# Altium PCB PCB1.PcbDoc (part 2 of 2)
Units mm, origin at the board's own origin, x right, y up, seen from the top; angles counter-clockwise.
Board outline 100 x 100 mm, 2 copper layers (Top Layer, Bottom Layer), stack 1.569 mm thick; 195 components, 137 nets, 444 pads, 96 vias.
Unrouted connection lines stored in the file: 120.
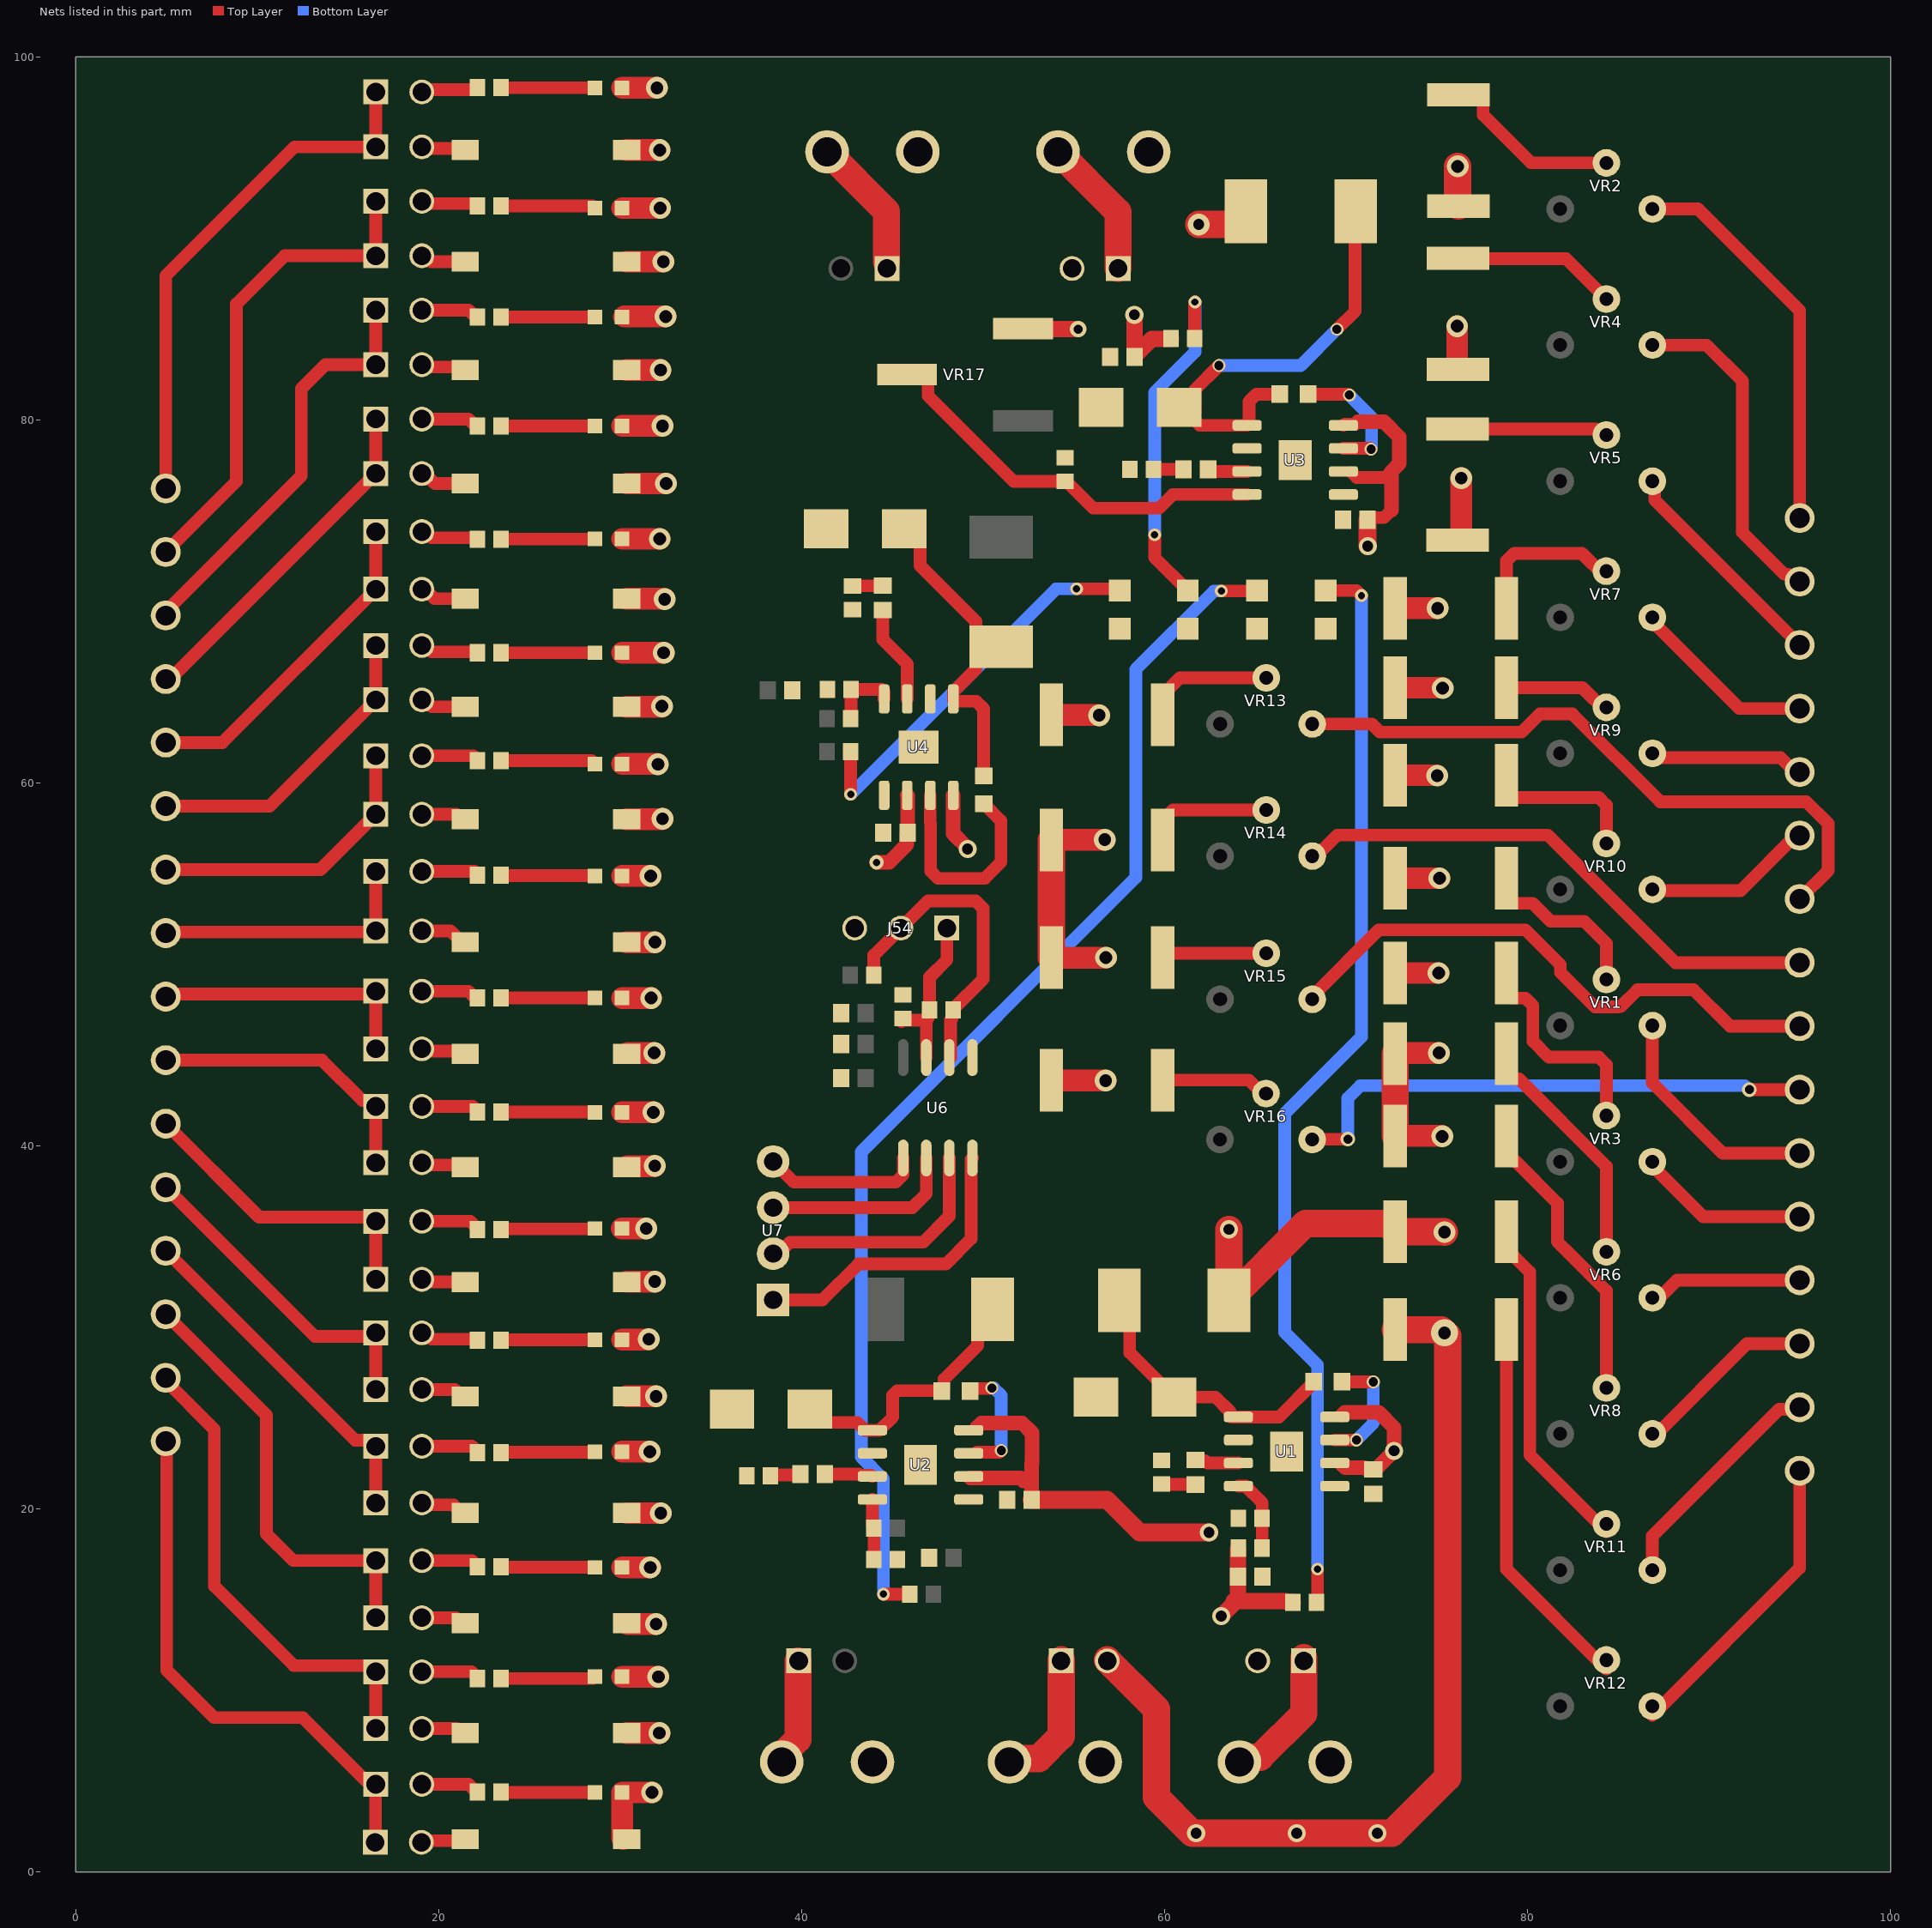
[diagram p2: the nets of this part, all layers, seen from the top]

## Via types
v1: diameter 1.2, hole 0.7, Top Layer to Bottom Layer, 51 vias
v2: diameter 1, hole 0.6, Top Layer to Bottom Layer, 13 vias
v3: diameter 0.7, hole 0.4, Top Layer to Bottom Layer, 8 vias
v4: diameter 0.711, hole 0.5, Top Layer to Bottom Layer, 6 vias
v5: diameter 1.2, hole 0.6, Top Layer to Bottom Layer, 5 vias
v6: diameter 4, hole 3.1, Top Layer to Bottom Layer, 4 vias
v7: diameter 0.7, hole 0.5, Top Layer to Bottom Layer, 3 vias
v8: diameter 0.8, hole 0.5, Top Layer to Bottom Layer, 2 vias
v9: diameter 0.9, hole 0.5, Top Layer to Bottom Layer, 2 vias
v10: diameter 1.5, hole 0.7, Top Layer to Bottom Layer, 1 vias
v11: diameter 0.8, hole 0.4, Top Layer to Bottom Layer, 1 vias

## Nets (pads, with @x,y where several pads share a name; then routed paths per layer and width w, separated by ;. In a path a pad name is that pad's centre, name@x,y a point inside that pad or via, vN(x,y) a via of type N, cw(c..) or ccw(c..) an arc to the next point about the centre after c; other vN are vias at no path point) (continued)
+12V: C3.2 D1.1 D2.1 D3.1 D4.1 D5.1 D6.1 D7.1 D8.1 D9.1 D10.1 D11.1 D12.1 D13.1 D14.1 D15.1 D16.1 J57.02 L1.1 R17.1 R18.1 R19.1 R20.1 R21.1 R22.1 R23.1 R24.1 R25.1 R26.1 R27.1 R28.1 R29.1 R30.1 R31.1 R32.1 R50.1 R52.2 S1.2 S2.2 S3.2 S4.2 S5.2 S6.2 S7.2 S8.2 S9.2 S10.2 S11.2 S12.2 S13.2 S14.2 S15.2 S16.2 | length 186.6
  Top Layer w0.9: v2(63.125,14.094) 63.874,14.843 63.809,14.909 ; R50.1@64.05,17.811 64.05,15.15 63.809,14.909 ; R52.2@67.06,14.843 67.035,14.868 66.736,14.868 66.696,14.909 63.809,14.909 ; R20.1@76.125,82.775 R20.1@76.15,82.75
  Top Layer w1: D6.1@30.1,85.675 30.2,85.675 D6.1@30.225,85.7 ; S11.2@30.35,13.7 S11.2@30.4,13.65 ; S9.2@30.35,19.775 S9.2@30.363,19.762 ; S5.2@30.35,32.5 S5.2@30.375,32.525 ; S3.2@30.35,38.825 S3.2@30.4,38.875 ; S1.2@30.35,45.075 S1.2@30.4,45.125 ; v1@31.55,29.325 v1(31.575,29.35) ; v1@31.875,38.875 v1(31.9,38.9) ; v1@32.05,61.05 v1(32.075,61.025) ; v1@32.275,64.2 v1(32.3,64.225) ; v1@32.425,70.15 v1(32.45,70.125) ; R22.1@72.709,45.075 R22.1@72.759,45.125 ; v1@75,60.425 v1(75.025,60.4) ; v1@75.275,40.55 v1(75.3,40.525) ; v1@75.3,65.25 v1(75.325,65.225)
  Top Layer w1.2: D5.1@30.075,35.45 v1(31.434,35.45) ; D13.1@30.1,10.75 v1(32.1,10.75) ; D11.1@30.1,16.775 v1(31.65,16.775) ; D9.1@30.1,23.15 v1(31.625,23.15) ; D7.1@30.1,29.325 v1@31.55,29.325 ; D3.1@30.1,41.85 v1(31.825,41.85) ; D1.1@30.1,48.15 v1(31.7,48.15) ; D16.1@30.1,54.875 v1(31.675,54.875) ; D14.1@30.1,61.05 v1@32.05,61.05 ; D12.1@30.1,67.175 v1(32.392,67.175) ; D10.1@30.1,73.45 v1(32.175,73.45) ; D8.1@30.1,79.675 v1(32.325,79.675) ; D4.1@30.1,91.675 v1(32.2,91.675) ; D2.1@30.1,98.3 v1(32.025,98.3) ; S15.2@30.15,1.8 30.1,1.85 D15.1@30.1,4.375 v1(31.75,4.375) ; D6.1@30.225,85.7 v1(32.5,85.7) ; S13.2@30.35,7.65 v1(32.157,7.65) ; S7.2@30.35,26.2 v1(31.975,26.2) ; S16.2@30.35,51.225 v1(31.912,51.225) ; S14.2@30.35,58 32.3,58 v1(32.325,58.025) ; S12.2@30.35,64.2 v1@32.275,64.2 ; S10.2@30.35,70.15 v1@32.425,70.15 ; S8.2@30.35,76.5 v1(32.525,76.5) ; S6.2@30.35,82.75 v1(32.225,82.75) ; S4.2@30.35,88.725 v1(32.375,88.725) ; S2.2@30.35,94.875 v1(32.175,94.875) ; S9.2@30.363,19.762 v1(32.238,19.762) ; S5.2@30.375,32.525 v1(31.9,32.525) ; S11.2@30.4,13.65 v1(31.975,13.65) ; S3.2@30.4,38.875 v1@31.875,38.875 ; S1.2@30.4,45.125 v1(31.875,45.125) ; R32.1@53.759,43.625 53.784,43.6 v1(56.75,43.6) ; R31.1@53.759,50.375 56.762,50.375 v1(56.766,50.379) ; R30.1@53.759,56.85 53.784,56.875 v1(56.7,56.875) ; R29.1@53.759,63.75 56.374,63.75 v1(56.393,63.731) ; R24.1@72.709,40.55 v1@75.275,40.55 ; R19.1@72.709,49.525 v1(75.1,49.525) ; R17.1@72.709,54.75 v1(75.15,54.75) ; R26.1@72.709,60.425 v1@75,60.425 ; R25.1@72.709,65.25 v1@75.3,65.25 ; R23.1@72.709,69.625 v1(75.05,69.625) ; R22.1@72.759,45.125 v1(75.125,45.125) ; R20.1@76.125,82.775 v1(76.125,85.173) ; R21.1@76.15,73.375 76.309,73.375 76.35,73.416 v1(76.35,76.8)
  Top Layer w1.5: R31.1@53.759,50.375 R30.1@53.759,56.85 ; J57.02@56.84,11.675 59.55,8.965 59.55,4.1 61.525,2.125 72.526,2.125 75.6,5.199 75.6,29.525 75.25,29.875 R28.1@72.709,29.875 ; v2(63.55,35.4) L1.1@63.55,31.5 67.775,35.725 72.259,35.725 R27.1@72.709,35.275 75.4,35.275 v1(75.425,35.25) ; R24.1@72.709,40.55 R22.1@72.709,45.075 ; v1(76.15,93.975) 76.15,91.834 R18.1@76.2,91.784
  other v2: 61.737,2.125 67.277,2.125 71.729,2.125
  other v10: 75.425,29.7
+24V: J49.2 J55.01 | length 7.7
  Top Layer w1.5: J49.2@64.125,6.05 64.393,6.318 65.268,6.318 67.665,8.715 J55.01@67.665,11.8
+V: C10.2 J56.02 L3.1 R59.2 VR17.3 | length 10.7
  Top Layer w0.7: VR17.3@52.2,85.04 VR17.3@52.232,85.008 ; v9@55.234,85.008 v9(55.237,85.005)
  Top Layer w0.9: VR17.3@52.232,85.008 v9@55.234,85.008 ; v2(58.337,85.797) 58.35,85.783 C10.2@58.35,83.525 ; C10.2@58.35,83.475 C10.2@58.35,83.525 ; R59.2@60.35,84.5 60.325,84.475 59.3,84.475 C10.2@58.35,83.525 ; L3.1@63.75,90.775 L3.1@64.475,91.5
  Top Layer w1.5: v5(61.875,90.775) L3.1@63.75,90.775
GND: C1.2 C2.2 C3.1 C6.1 C8.2 C10.1 C11.2 C14.1 C17.1 C18.1 C19.1 D17.2 D18.1 D19.2 D20.1 D21.2 D22.1 D23.1 D24.2 J49.1 J50.1 J51.1 J52.1 J53.1 J54.03 R49.2 R51.2 R54.1 R56.2 R57.1 R58.2 R61.1 R63.1 R66.1 U1.2 U1.5 U1.9 U2.2 U2.5 U2.9 U3.2 U3.5 U3.9 U4.2 U4.5 U4.9 U6.5
NetC4_1: C4.1 R54.2 | length 1.9
  Top Layer w0.7: R54.2@59.825,21.361 59.837,21.349 61.687,21.349 C4.1@61.7,21.336
NetC4_2: C4.2 U1.3 | length 2.4
  Top Layer w0.7: C4.2@61.7,22.686 61.737,22.649 62.226,22.649 62.349,22.526 U1.3@64.07,22.526
NetC5_1: C5.1 D18.2 L1.2 U1.1 | length 15.7
  Top Layer w0.7: L1.2@57.5,31.5 58.075,30.925 58.075,28.611 D18.2@60.525,26.161 62.8,26.161 63.615,25.346 63.615,25.126 63.675,25.066 U1.1@64.07,25.066 ; U1.1@64.067,25.068 U1.1@64.07,25.066 ; C5.1@68.225,27 68.225,26.975 66.316,25.066 U1.1@64.07,25.066
NetC5_2: C5.2 U1.7 | length 6.5
  Top Layer w0.7: U1.7@69.38,23.796 v4(70.573,23.796) ; C5.2@69.775,26.975 C5.2@69.775,27 v4(71.5,27)
  Bottom Layer w0.7: v4(70.573,23.796) 70.573,23.799 71.5,24.726 v4(71.5,27)
NetC7_1: C7.1 R57.2 | length 1.7
  Top Layer w0.7: R57.2@38.28,21.815 38.33,21.865 39.88,21.865 C7.1@39.93,21.915
NetC7_2: C7.2 U2.3 | length 2.7
  Top Layer w0.7: C7.2@41.28,21.915 43.17,21.915 43.235,21.85 43.835,21.85 U2.3@43.895,21.79
NetC9_1: C9.1 D20.2 L2.2 U2.1 | length 14.8
  Top Layer w0.7: D20.2@40.455,25.49 41.18,24.765 43.065,24.765 43.5,24.33 U2.1@43.895,24.33 44.29,24.33 45.015,25.055 45.015,26.265 45.265,26.515 C9.1@47.475,26.515 ; C9.1@47.725,26.525 C9.1@47.725,26.5 47.835,26.61 47.835,27.135 49.7,29 49.7,30.175 L2.2@50.525,31
NetC9_2: C9.2 U2.7 | length 6.4
  Top Layer w0.7: C9.2@49.275,26.5 49.275,26.525 49.385,26.635 50.445,26.635 50.473,26.663 v4(50.476,26.663) ; U2.7@49.66,23.12 50.9,23.12 50.997,23.218 v4(51,23.218)
  Bottom Layer w0.7: v4(50.476,26.663) 50.478,26.661 50.587,26.661 51,26.248 v4(51,23.218)
NetC12_1: C12.1 R61.2 | length 1.7
  Top Layer w0.7: R61.2@59.375,77.275 C12.1@61.05,77.275
NetC12_2: C12.2 U3.3 | length 2.2
  Top Layer w0.7: C12.2@62.4,77.275 62.4,77.265 62.5,77.165 U3.3@64.545,77.165
NetC13_1: C13.1 D22.2 L3.2 U3.1 | length 25
  Top Layer w0.7: D22.2@60.8,80.7 61.075,80.425 D22.2@61.675,80.425 ; D22.2@60.95,80.7 61.945,79.705 U3.1@64.545,79.705 ; D22.2@61.475,80.5 61.675,80.7 61.675,81.675 v7(63,83) ; U3.1@64.65,79.765 64.65,81.015 65.06,81.425 C13.1@66.35,81.425 ; v7(69.5,85) 70.5,86 L3.2@70.5,90.966
  Bottom Layer w0.7: v7(63,83) 67.5,83 v7(69.5,85)
NetC13_2: C13.2 U3.7 | length 7.3
  Top Layer w0.7: C13.2@67.9,81.425 70.126,81.425 70.178,81.373 v4(70.181,81.373) ; U3.7@69.855,78.435 69.864,78.444 71.325,78.444 v7(71.375,78.394)
  Bottom Layer w0.7: v4(70.181,81.373) 71.41,80.144 71.41,78.485 71.375,78.45 v7(71.375,78.394)
NetC15_1: C15.1 R63.2 | length 1.7
  Top Layer w0.7: R63.2@42.8,70.85 42.813,70.862 44.462,70.862 C15.1@44.475,70.875
NetC15_2: C15.2 U4.3 | length 5.5
  Top Layer w0.7: C15.2@44.475,69.525 44.475,67.895 45.815,66.555 U4.3@45.815,64.63
NetC16_1: C16.1 D23.2 L4.2 U4.1 | length 18.5
  Top Layer w0.7: D23.2@45.65,74 45.8,74 46.525,73.275 46.525,71.975 49.6,68.9 49.6,68.325 L4.2@50.425,67.5 ; C16.1@50.025,60.4 50.025,64.09 49.615,64.5 48.415,64.5 48.355,64.56 U4.1@48.355,64.63 48.355,65.025 49.6,66.27 49.6,66.675 L4.2@50.425,67.5 ; L4.2@51,67.5 L4.2@50.425,67.5
NetC16_2: C16.2 U4.7 | length 12.2
  Top Layer w0.7: U4.7@47.085,59.32 47.083,59.317 47.083,57.785 47.1,57.768 47.1,55.154 47.51,54.744 50.09,54.744 50.986,55.64 50.986,57.914 50.05,58.85 C16.2@50.025,58.85
NetD1_2: D1.2 R1.2 | length 5.2
  Top Layer w0.7: R1.2@23.425,48.15 D1.2@28.6,48.15
NetD2_2: D2.2 R2.2 | length 5.2
  Top Layer w0.7: R2.2@23.425,98.325 23.437,98.312 28.587,98.312 D2.2@28.6,98.3
NetD3_2: D3.2 R3.2 | length 5.2
  Top Layer w0.7: R3.2@23.425,41.875 23.437,41.863 28.587,41.863 D3.2@28.6,41.85
NetD4_2: D4.2 R4.2 | length 5.2
  Top Layer w0.7: R4.2@23.425,91.8 28.475,91.8 D4.2@28.6,91.675
NetD5_2: D5.2 R5.2 | length 5.2
  Top Layer w0.7: R5.2@23.425,35.4 23.45,35.425 28.55,35.425 D5.2@28.575,35.45
NetD6_2: D6.2 R6.2 | length 5.2
  Top Layer w0.7: R6.2@23.425,85.675 D6.2@28.6,85.675
NetD7_2: D7.2 R7.2 | length 5.2
  Top Layer w0.7: R7.2@23.425,29.3 23.437,29.313 28.587,29.313 D7.2@28.6,29.325
NetD8_2: D8.2 R8.2 | length 5.2
  Top Layer w0.7: R8.2@23.425,79.675 D8.2@28.6,79.675
NetD9_2: D9.2 R9.2 | length 5.2
  Top Layer w0.7: R9.2@23.425,23.1 23.45,23.125 28.575,23.125 D9.2@28.6,23.15
NetD10_2: D10.2 R10.2 | length 5.2
  Top Layer w0.7: R10.2@23.425,73.425 23.437,73.438 28.587,73.438 D10.2@28.6,73.45
NetD11_2: D11.2 R11.2 | length 5.2
  Top Layer w0.7: R11.2@23.425,16.8 23.437,16.788 28.587,16.788 D11.2@28.6,16.775
NetD12_2: D12.2 R12.2 | length 5.2
  Top Layer w0.7: R12.2@23.425,67.175 D12.2@28.6,67.175
NetD13_2: D13.2 R13.2 | length 5.2
  Top Layer w0.7: R13.2@23.425,10.65 28.5,10.65 D13.2@28.6,10.75
NetD14_2: D14.2 R14.2 | length 5.2
  Top Layer w0.7: R14.2@23.425,61.225 28.425,61.225 D14.2@28.6,61.05
NetD15_2: D15.2 R15.2 | length 5.2
  Top Layer w0.7: R15.2@23.45,4.375 D15.2@28.6,4.375
NetD16_2: D16.2 R16.2 | length 5.2
  Top Layer w0.7: R16.2@23.425,54.925 23.45,54.9 28.575,54.9 D16.2@28.6,54.875
NetD17_1: D17.1 R52.1 | length 60.1
  Top Layer w0.7: R52.1@68.36,14.893 R52.1@68.36,14.843 68.425,14.908 v3(68.425,16.675) ; D17.1@68.875,70.6 70.575,70.6 v3(70.85,70.325)
  Bottom Layer w0.7: v3(68.425,16.675) 68.425,27.922 66.618,29.729 66.618,41.78 70.85,46.012 v3(70.85,70.325)
NetD19_1: D19.1 R55.1 | length 67.7
  Top Layer w0.7: v3(44.5,15.3) R55.1@45.95,15.3 R55.1@45.937,15.313 ; v3(63.125,70.575) 65,70.575 D19.1@65.112,70.688
  Bottom Layer w0.7: v3(44.5,15.3) 44.5,21.649 43.288,22.861 43.288,39.667 58.412,54.791 58.412,66.262 62.725,70.575 v3(63.125,70.575)
NetD21_1: D21.1 R59.1 | length 19.6
  Top Layer w0.7: v3(59.45,73.675) 59.45,72.425 D21.1@61.275,70.6 ; R59.1@61.65,84.5 61.65,86.475 v3(61.675,86.5)
  Bottom Layer w0.7: v3(59.45,73.675) 59.45,81.518 61.675,83.743 v3(61.675,86.5)
NetD24_1: D24.1 R62.1 | length 21.9
  Top Layer w0.7: v3(42.7,59.375) R62.1@42.7,61.725 ; v3(55.15,70.7) 57.425,70.7 D24.1@57.525,70.6
  Bottom Layer w0.7: v3(42.7,59.375) 54.025,70.7 v3(55.15,70.7)
NetJ1_01: J1.01 J2.2 J5.01 | length 14.9
  Top Layer w0.7: J2.2@4.95,48.225 5.1,48.375 16.375,48.375 J1.01@16.525,48.525 J5.01@16.525,45.35
NetJ1_02: J1.02 R1.1 | length 3.2
  Top Layer w0.7: J1.02@19.065,48.525 21.64,48.525 21.89,48.275 22.05,48.275 22.125,48.2 R1.1@22.125,48.15
NetJ2_1: J2.1 J7.01 J9.01 | length 15.7
  Top Layer w0.7: J2.1@4.95,44.725 13.566,44.725 15.781,42.51 16.19,42.51 J7.01@16.525,42.175 J9.01@16.525,39.075
NetJ3_01: J3.01 J4.2 J6.01 | length 29.3
  Top Layer w0.7: J4.2@4.95,76.225 4.95,87.95 12.05,95.05 J6.01@16.525,95.05 J3.01@16.525,98.075
NetJ3_02: J3.02 R2.1 | length 3.2
  Top Layer w0.7: J3.02@19.065,98.075 19.19,98.2 22.05,98.2 22.125,98.275 R2.1@22.125,98.325
NetJ4_1: J4.1 J8.01 J10.01 | length 27.1
  Top Layer w0.7: J4.1@4.95,72.725 8.85,76.625 8.85,86.4 11.5,89.05 J10.01@16.525,89.05 J8.01@16.525,92.05
NetJ5_02: J5.02 S1.1 | length 2.5
  Top Layer w0.7: J5.02@19.065,45.35 19.193,45.222 21.303,45.222 S1.1@21.45,45.075
NetJ6_02: J6.02 S2.1 | length 2.5
  Top Layer w0.7: J6.02@19.065,95.05 19.153,94.962 21.362,94.962 S2.1@21.45,94.875
NetJ7_02: J7.02 R3.1 | length 3.2
  Top Layer w0.7: J7.02@19.065,42.175 21.875,42.175 22.125,41.925 R3.1@22.125,41.875
NetJ8_02: J8.02 R4.1 | length 3.2
  Top Layer w0.7: J8.02@19.065,92.05 19.19,91.925 22.05,91.925 22.125,91.85 R4.1@22.125,91.8
NetJ9_02: J9.02 S3.1 | length 2.5
  Top Layer w0.7: J9.02@19.065,39.075 19.193,38.947 21.328,38.947 S3.1@21.45,38.825
NetJ10_02: J10.02 S4.1 | length 2.5
  Top Layer w0.7: J10.02@19.065,89.05 19.246,89.05 19.571,88.725 S4.1@21.45,88.725
NetJ11_01: J11.01 J12.2 J15.01 | length 17
  Top Layer w0.7: J12.2@4.95,41.225 10.098,36.077 16.298,36.077 J11.01@16.525,35.85 J15.01@16.525,32.65
NetJ11_02: J11.02 R5.1 | length 3.3
  Top Layer w0.7: J11.02@19.065,35.85 21.725,35.85 22.125,35.45 R5.1@22.125,35.4
NetJ12_1: J12.1 J17.01 J19.01 | length 18.2
  Top Layer w0.7: J12.1@4.95,37.725 13.175,29.5 16.325,29.5 J17.01@16.525,29.7 J19.01@16.525,26.575
NetJ13_01: J13.01 J14.2 J16.01 | length 23.2
  Top Layer w0.7: J14.2@4.95,69.225 4.95,69.45 12.425,76.925 12.425,81.725 13.75,83.05 J16.01@16.525,83.05 J13.01@16.525,86.05
NetJ13_02: J13.02 R6.1 | length 3.2
  Top Layer w0.7: J13.02@19.065,86.05 21.64,86.05 21.89,85.8 22.05,85.8 22.125,85.725 R6.1@22.125,85.675
NetJ14_1: J14.1 J18.01 J20.01 | length 19.3
  Top Layer w0.7: J14.1@4.95,65.725 5.2,65.725 J20.01@16.525,77.05 J18.01@16.525,80.05
NetJ15_02: J15.02 S5.1 | length 2.4
  Top Layer w0.7: J15.02@19.065,32.65 19.193,32.522 19.667,32.522 19.689,32.5 S5.1@21.45,32.5
NetJ16_02: J16.02 S6.1 | length 2.5
  Top Layer w0.7: J16.02@19.065,83.05 19.193,82.922 21.278,82.922 S6.1@21.436,82.764
NetJ17_02: J17.02 R7.1 | length 3.2
  Top Layer w0.7: J17.02@19.065,29.7 19.246,29.7 19.596,29.35 R7.1@22.125,29.35
NetJ18_02: J18.02 R8.1 | length 3.2
  Top Layer w0.7: J18.02@19.065,80.05 21.64,80.05 21.89,79.8 22.05,79.8 22.125,79.725 R8.1@22.125,79.675
NetJ19_02: J19.02 S7.1 | length 2.5
  Top Layer w0.7: J19.02@19.065,26.575 20.875,26.575 21.25,26.2 S7.1@21.45,26.2
NetJ20_02: J20.02 S8.1 | length 2.6
  Top Layer w0.7: J20.02@19.065,77.05 19.235,77.05 19.785,76.5 S8.1@21.45,76.5
NetJ21_01: J21.01 J22.2 J25.01 | length 19.2
  Top Layer w0.7: J22.2@4.95,34.225 15.398,23.777 16.198,23.777 J21.01@16.525,23.45 J25.01@16.525,20.325
NetJ21_02: J21.02 R9.1 | length 3.2
  Top Layer w0.7: J21.02@19.065,23.45 21.825,23.45 22.125,23.15 R9.1@22.125,23.1
NetJ22_1: J22.1 J27.01 J29.01 | length 24.2
  Top Layer w0.7: J22.1@4.95,30.725 10.5,25.175 10.5,18.625 11.975,17.15 J27.01@16.525,17.15 J29.01@16.525,14
NetJ23_01: J23.01 J24.2 J26.01 | length 18.3
  Top Layer w0.7: J24.2@4.95,62.225 8.075,62.225 J26.01@16.525,70.675 J23.01@16.525,73.85
NetJ23_02: J23.02 R10.1 | length 3.2
  Top Layer w0.7: J23.02@19.065,73.85 19.246,73.85 19.583,73.513 22.05,73.513 22.125,73.438 R10.1@22.125,73.425
NetJ24_1: J24.1 J28.01 J30.01 | length 17
  Top Layer w0.7: J24.1@4.95,58.725 10.675,58.725 J30.01@16.525,64.575 J28.01@16.525,67.575
NetJ25_02: J25.02 S9.1 | length 2.6
  Top Layer w0.7: J25.02@19.065,20.325 19.165,20.225 20.8,20.225 21.25,19.775 S9.1@21.45,19.775
NetJ26_02: J26.02 S10.1 | length 2.6
  Top Layer w0.7: J26.02@19.065,70.675 19.246,70.675 19.771,70.15 S10.1@21.45,70.15
NetJ27_02: J27.02 R11.1 | length 3.2
  Top Layer w0.7: J27.02@19.065,17.15 21.825,17.15 22.125,16.85 R11.1@22.125,16.8
NetJ28_02: J28.02 R12.1 | length 3.2
  Top Layer w0.7: J28.02@19.065,67.575 19.246,67.575 19.596,67.225 R12.1@22.125,67.225
NetJ29_02: J29.02 S11.1 | length 2.5
  Top Layer w0.7: J29.02@19.065,14 20.95,14 21.25,13.7 S11.1@21.45,13.7
NetJ30_02: J30.02 S12.1 | length 2.5
  Top Layer w0.7: J30.02@19.065,64.575 19.246,64.575 19.621,64.2 S12.1@21.45,64.2
NetJ31_01: J31.01 J32.2 J35.01 | length 26.6
  Top Layer w0.7: J32.2@4.95,27.225 4.95,27.05 7.625,24.375 7.625,15.75 12.015,11.36 16.19,11.36 J31.01@16.525,11.025 J35.01@16.525,7.9
NetJ31_02: J31.02 R13.1 | length 3.2
  Top Layer w0.7: J31.02@19.065,11.025 21.8,11.025 22.125,10.7 R13.1@22.125,10.65
NetJ32_1: J32.1 J37.01 J39.01 | length 29.7
  Top Layer w0.7: J32.1@5,23.425 5,11.113 7.613,8.5 12.5,8.5 15.99,5.01 16.34,5.01 J37.01@16.525,4.825 16.513,4.812 16.513,1.638 J39.01@16.5,1.625
NetJ33_01: J33.01 J34.2 J36.01 | length 16.1
  Top Layer w0.7: J34.2@4.95,55.225 13.475,55.225 J36.01@16.525,58.275 J33.01@16.525,61.5
NetJ33_02: J33.02 R14.1 | length 3.2
  Top Layer w0.7: J33.02@19.065,61.5 21.9,61.5 22.125,61.275 R14.1@22.125,61.225
NetJ34_1: J34.1 J38.01 J40.01 | length 14.9
  Top Layer w0.7: J34.1@4.95,51.725 5.012,51.788 16.462,51.788 J40.01@16.525,51.85 J38.01@16.525,55.125
NetJ35_02: J35.02 S13.1 | length 2.5
  Top Layer w0.7: J35.02@19.065,7.9 21,7.9 21.25,7.65 S13.1@21.45,7.65
NetJ36_02: J36.02 S14.1 | length 2.5
  Top Layer w0.7: J36.02@19.065,58.275 20.975,58.275 21.25,58 S14.1@21.45,58
NetJ37_02: J37.02 R15.1 | length 3.3
  Top Layer w0.7: J37.02@19.065,4.825 21.64,4.825 21.94,4.525 22.05,4.525 22.125,4.45 R15.1@22.125,4.4
NetJ38_02: J38.02 R16.1 | length 3.2
  Top Layer w0.7: J38.02@19.065,55.125 21.975,55.125 22.125,54.975 R16.1@22.125,54.925
NetJ39_02: J39.02 S15.1 | length 2.5
  Top Layer w0.7: J39.02@19.04,1.625 19.128,1.713 21.362,1.713 S15.1@21.45,1.8
NetJ40_02: J40.02 S16.1 | length 2.7
  Top Layer w0.7: J40.02@19.065,51.85 20.64,51.85 21.05,51.44 21.05,51.425 21.25,51.225 S16.1@21.45,51.225
NetJ41_1: J41.1 VR1.3 | length 12.7
  Top Layer w0.7: VR1.3@86.885,46.4 86.885,43.465 90.75,39.6 J41.1@95,39.6
NetJ41_2: J41.2 VR3.3 | length 9.3
  Top Layer w0.7: VR3.3@86.885,38.891 89.676,36.1 J41.2@95,36.1
NetJ42_1: J42.1 VR2.3 | length 21.9
  Top Layer w0.7: VR2.3@86.885,91.629 89.396,91.629 95,86.025 J42.1@95,74.6
NetJ42_2: J42.2 VR4.3 | length 18.4
  Top Layer w0.7: VR4.3@86.885,84.129 89.871,84.129 91.85,82.15 91.85,73.8 94.149,71.501 94.342,71.501 94.743,71.1 J42.2@95,71.1
NetJ43_1: J43.1 VR5.3 | length 12.4
  Top Layer w0.7: VR5.3@86.885,76.629 87.009,76.505 87.009,75.591 J43.1@95,67.6
NetJ43_2: J43.2 VR7.3 | length 10.1
  Top Layer w0.7: VR7.3@86.885,68.891 91.676,64.1 J43.2@95,64.1
NetJ44_1: J44.1 VR6.3 | length 8.6
  Top Layer w0.7: VR6.3@86.885,31.391 87.029,31.391 88.238,32.6 J44.1@95,32.6
NetJ44_2: J44.2 VR8.3 | length 10.3
  Top Layer w0.7: VR8.3@86.885,23.891 92.094,29.1 J44.2@95,29.1
NetJ45_1: J45.1 VR9.3 | length 8.6
  Top Layer w0.7: VR9.3@86.751,61.525 86.885,61.391 93.952,61.391 94.743,60.6 J45.1@95,60.6
NetJ45_2: J45.2 VR10.3 | length 9.5
  Top Layer w0.7: VR10.3@86.885,53.891 86.885,54.008 86.94,54.063 91.738,54.063 94.775,57.1 J45.2@95,57.1
NetJ46_1: J46.1 VR11.3 | length 13.3
  Top Layer w0.7: VR11.3@86.885,16.214 86.885,18.511 93.861,25.487 94.887,25.487 J46.1@95,25.6
NetJ46_2: J46.2 VR12.3 | length 16.8
  Top Layer w0.7: VR12.3@86.885,8.629 95,16.744 J46.2@95,22.1
NetJ47_1: J47.1 VR13.3 | length 36.3
  Top Layer w0.7: VR13.3@68.14,63.25 71.42,63.25 71.867,62.803 79.683,62.803 80.68,63.8 82.475,63.8 87.31,58.965 95.362,58.965 96.575,57.752 96.575,55.175 J47.1@95,53.6
NetJ47_2: J47.2 VR14.3 | length 30.3
  Top Layer w0.7: VR14.3@68.14,55.97 68.363,55.97 69.521,57.128 81.122,57.128 88.15,50.1 J47.2@95,50.1
NetJ48_1: J48.1 VR15.3 | length 31.8
  Top Layer w0.7: VR15.3@68.14,48.077 68.14,48.244 71.798,51.903 79.89,51.903 81.805,49.989 81.805,49.571 83.719,47.657 84.971,47.657 84.989,47.675 85.132,47.675 86.057,48.6 89.157,48.6 91.157,46.6 J48.1@95,46.6
NetJ48_2: J48.2 VR16.3 | length 29.5
  Top Layer w0.7: VR16.3@68.14,40.352 68.152,40.364 70.087,40.364 v8(70.099,40.376) ; v8(92.225,43.1) J48.2@95,43.1
  Bottom Layer w0.7: v8(70.099,40.376) 70.099,42.639 70.785,43.325 91.973,43.325 92.198,43.1 v8(92.225,43.1)
NetJ50_2: J50.2 J57.01 | length 7.6
  Top Layer w1.5: J50.2@51.45,6.05 51.647,6.247 53.072,6.247 54.3,7.475 J57.01@54.3,11.675
NetJ51_2: J51.2 J56.01 | length 7.8
  Top Layer w1.5: J51.2@54.125,94.775 57.44,91.46 J56.01@57.44,88.35
NetJ52_2: J52.2 J58.01 | length 5.9
  Top Layer w1.5: J52.2@38.9,6.05 38.9,6.41 39.8,7.31 J58.01@39.8,11.613
NetJ53_2: J53.2 J59.01 | length 7.4
  Top Layer w1.5: J53.2@41.4,94.775 44.675,91.5 J59.01@44.675,88.706
NetJ54_01: J54.01 R65.2 R66.2 U6.7 | length 8.7
  Top Layer w0.7: R66.2@45.5,46.85 45.575,46.925 46.532,46.925 ; U6.7@46.865,44.868 46.865,46.954 46.972,47.061 46.972,47.415 R65.2@47.047,47.49 47.047,49.293 48,50.246 J54.01@48,52
NetJ54_02: J54.02 R64.1 R65.1 U6.6 | length 17.5
  Top Layer w0.7: R64.1@43.975,49.4 43.975,50.515 46.96,53.5 49.59,53.5 50,53.09 50,49.193 R65.1@48.347,47.54 ; U6.6@48.198,44.868 48.198,46.944 48.272,47.017 48.272,47.415 R65.1@48.347,47.49
NetR17_2: R17.2 VR1.2 | length 9.9
  Top Layer w0.7: R17.2@78.841,54.75 78.841,53.663 79.133,53.372 80.283,53.372 81.276,52.379 83.131,52.379 84.345,51.165 VR1.2@84.345,48.94
NetR18_2: R18.2 VR2.2 | length 9.9
  Top Layer w0.7: R18.2@76.445,97.916 77.259,97.916 77.55,97.625 77.55,96.812 80.193,94.169 VR2.2@84.345,94.169
NetR19_2: R19.2 VR3.2 | length 12.2
  Top Layer w0.7: R19.2@78.841,49.525 78.841,48.438 79.133,48.147 79.883,48.147 80.293,47.737 80.293,45.774 81.179,44.888 83.935,44.888 84.345,44.478 VR3.2@84.345,41.669
NetR20_2: R20.2 VR4.2 | length 9.1
  Top Layer w0.7: R20.2@76.15,88.883 82.131,88.883 VR4.2@84.345,86.669
NetR21_2: R21.2 VR5.2 | length 8.3
  Top Layer w0.7: R21.2@76.15,79.508 83.783,79.508 84.122,79.169 VR5.2@84.345,79.169
NetR22_2: R22.2 VR6.2 | length 13.7
  Top Layer w0.7: R22.2@78.841,45.075 78.841,43.988 79.133,43.697 79.528,43.697 84.345,38.88 VR6.2@84.345,33.931
NetR23_2: R23.2 VR7.2 | length 8.8
  Top Layer w0.7: R23.2@78.841,69.625 78.841,72.24 79.251,72.65 83.002,72.65 84.221,71.431 VR7.2@84.345,71.431
NetR24_2: R24.2 VR8.2 | length 16.5
  Top Layer w0.7: R24.2@78.841,40.55 78.841,39.463 79.133,39.172 79.328,39.172 81.65,36.85 81.65,34.726 82.452,33.923 84.345,32.031 VR8.2@84.345,26.431
NetR25_2: R25.2 VR9.2 | length 6.1
  Top Layer w0.7: R25.2@78.841,65.25 83.026,65.25 VR9.2@84.345,63.931
NetR26_2: R26.2 VR10.2 | length 9.1
  Top Layer w0.7: R26.2@78.841,60.425 78.841,59.489 79.133,59.198 83.935,59.198 84.345,58.788 VR10.2@84.345,56.431
NetR27_2: R27.2 VR11.2 | length 18.9
  Top Layer w0.7: R27.2@78.841,35.275 78.841,34.188 79.133,33.897 79.28,33.897 80.133,33.044 80.133,22.966 VR11.2@84.345,18.754
NetR28_2: R28.2 VR12.2 | length 21
  Top Layer w0.7: R28.2@78.841,29.875 78.841,16.673 VR12.2@84.345,11.169
NetR29_2: R29.2 VR13.2 | length 7.2
  Top Layer w0.7: R29.2@59.891,63.75 59.891,64.837 60.845,65.79 VR13.2@65.6,65.79
NetR30_2: R30.2 VR14.2 | length 7
  Top Layer w0.7: R30.2@59.891,56.85 59.891,57.937 60.465,58.51 VR14.2@65.6,58.51
NetR31_2: R31.2 VR15.2 | length 5.8
  Top Layer w0.7: R31.2@59.891,50.375 60.133,50.617 VR15.2@65.6,50.617
NetR32_2: R32.2 VR16.2 | length 6
  Top Layer w0.7: R32.2@59.891,43.625 64.644,43.625 65.377,42.892 VR16.2@65.6,42.892
NetR49_1: R49.1 R50.2 U1.4 | length 4.2
  Top Layer w0.7: U1.4@64.07,21.256 64.465,21.256 65.375,20.346 R49.1@65.375,19.486 R50.2@65.375,17.836
NetR51_1: R51.1 R53.2 U2.4 | length 3.3
  Top Layer w0.7: U2.4@43.895,20.52 43.895,19.075 43.98,18.99 R53.2@43.98,18.94 R51.1@43.98,17.215
NetR56_1: R56.1 U3.4 VR17.2 | length 22.6
  Top Layer w0.7: VR17.2@45.8,82.5 46.72,82.5 46.965,82.255 46.965,81.335 51.675,76.625 R56.1@54.525,76.625 54.575,76.625 56.063,75.137 59.697,75.137 60.456,75.895 U3.4@64.545,75.895
NetR58_1: R58.1 R60.1 U4.4 | length 3.9
  Top Layer w0.7: R60.1@42.7,63.55 42.713,63.563 42.713,65.137 R58.1@42.725,65.15 44.42,65.15 44.545,65.025 U4.4@44.545,64.63
UART_CTS: U6.3 U7.2 | length 13.8
  Top Layer w0.7: U7.2@38.425,34.06 38.723,34.06 39.358,34.695 46.695,34.695 48.135,36.135 U6.3@48.135,39.332
UART_RTS: U6.2 U7.3 | length 10.7
  Top Layer w0.7: U7.3@38.425,36.6 46.1,36.6 46.865,37.365 U6.2@46.865,39.332
UART_RX: U6.4 U7.1 | length 16.8
  Top Layer w0.7: U7.1@38.425,31.52 41.151,31.52 43.126,33.495 47.951,33.495 49.335,34.879 49.335,38.531 49.342,38.538 49.342,39.269 U6.4@49.405,39.332
UART_TX: U6.1 U7.4 | length 8.7
  Top Layer w0.7: U7.4@38.425,39.14 39.565,38 43.184,38 45.185,38 45.595,38.41 U6.1@45.595,39.332
VCC: C1.1 C2.1 C8.1 C11.1 J55.02 U1.6 U1.8 U2.6 U2.8 U3.6 U3.8 U4.6 U4.8 | length 50.4
  Top Layer w0.7: U3.8@69.855,79.705 69.915,79.765 70.515,79.765 70.656,79.906 ; U3.6@70.31,77.105 70.577,76.838 72.173,76.838 72.5,77.165 ; v2@71.188,73.063 v2(71.2,73.05) ; C8.1@71.188,74.488 C8.1@71.175,74.5 71.175,74.52 71.275,74.62 72.09,74.62 72.5,75.03
  Top Layer w0.8: v11(44.125,55.625) 44.815,55.625 45.8,56.61 45.8,57.2 C11.1@45.85,57.25 45.833,57.267 45.833,59.302 U4.6@45.815,59.32 ; U4.8@48.355,59.32 48.355,57.198 49.143,56.41 v2(49.143,56.356) ; U2.6@49.295,21.7 52.065,21.7 52.227,21.538 52.675,21.538 ; U2.8@49.61,24.44 49.905,24.735 52.148,24.735 52.686,24.198 52.686,22.536 ; C2.1@52.625,20.45 C2.1@52.675,20.5 ; C2.1@52.675,20.55 52.675,21.538 ; 52.675,22.525 52.675,21.538 ; U1.6@69.785,22.416 69.807,22.416 69.945,22.278 71.013,22.278 71.066,22.225 71.45,22.225 C1.1@71.5,22.175 ; U1.8@69.785,25.176 69.923,25.313 71.81,25.313 72.65,24.473 v2(72.65,23.2) 71.675,22.225 71.6,22.225 C1.1@71.55,22.175 ; 70.656,79.906 72.09,79.906 72.937,79.059 72.937,77.602 72.5,77.165 72.5,75.03
  Top Layer w1: C2.1@52.675,20.5 56.825,20.5 58.625,18.7 v2(62.45,18.7) ; J55.02@65.054,11.729 J55.02@65.125,11.8 ; v2@71.188,73.063 C8.1@71.188,74.488
pads on no net: VR1.1 VR2.1 VR3.1 VR4.1 VR5.1 VR6.1 VR7.1 VR8.1 VR9.1 VR10.1 VR11.1 VR12.1 VR13.1 VR14.1 VR15.1 VR16.1 VR17.1
copper on no net:
  other v6: 5,6 94.95,6.2 5,94.5 94.975,94.75

## Polygon pours and split planes (outlines as drawn)
+3.3V on Bottom Layer "NONET_L02_P-001" (solid, remove dead copper, pour order 40): 37.4,89.725 37.4,61.575 37.725,61.25 43.625,61.25 44.122,61.747 44.122,89.528 43.675,89.975 37.65,89.975
VCC on Bottom Layer "NONET_L02_P-001" (solid, remove dead copper, pour order 73): 40,60.427 40,60.428 43.328,60.428 46.95,64.05 46.95,79.225 47.4,79.675 66.775,79.675 66.825,79.675 66.825,72.175 51.9,72.175 51.9,55.275 51.242,54.617 39.65,54.617 39.65,60.077
+12V on Bottom Layer "NONET_L02_P-001" (solid, pour order 67): 64.275,15.254 64.275,13.4 64.275,13.2 58.025,13.2 58.025,10.794 58.11,10.709 58.051,10.65 55.847,10.65 55.847,15.253 55.831,15.269
VCC on Bottom Layer "NONET_L02_P-001" (solid, remove dead copper, pour order 72): 63.425,26.327 61.748,24.65 61.75,24.65 61.75,9.225 61.675,9 97.639,9 98.708,10.069 98.8,10.45 98.849,97.775 98.9,97.775 97.275,99.4 68.081,99.4 66.85,98.125 66.825,98.125 66.825,72.175 72.425,72.175 72.43,72.176 72.475,72.2 72.6,72.275 72.6,95.6 80.494,95.6 92.975,83.119 92.975,26.327
+V on Bottom Layer "NONET_L02_P-001" (solid, pour order 63): 50.718,93.532 50.774,93.55 65.35,93.55 cw(c65.35,93.101) 65.799,93.101 65.799,83 50.901,83.099 50.6,83.25 50.401,83.599 50.401,84.983 50.401,93.177 50.445,93.281 cw(c50.858,93.105)
+12V on Bottom Layer "NONET_L02_P-001" (solid, pour order 68): 60.116,65.478 60.533,65.062 60.533,41.738 60.463,41.668 65.133,36.998 73.35,36.998 73.35,94.975 80.789,94.975 80.789,31.839 76.868,27.918 62.566,27.918 62.525,27.959 62.525,27.96 61.5,28.985 61.5,32.675 52.9,41.275 52.889,65.249 53.117,65.478
+3.3V on Bottom Layer "NONET_L02_P-001" (solid, remove dead copper, pour order 53): 39.851,49.925 40.575,50.649 40.575,50.675 46.25,50.675 47.2,49.725 47.2,32.275 46.495,31.57 40.228,31.57 40.225,31.576 39.851,31.95
VCC on Bottom Layer "NONET_L02_P-001" (solid, pour order 74): 39.875,59.017 39.875,59.064 39.872,59.067 33.85,59.067 33.425,58.642 33.409,58.6 33.599,4.035 ccw(c34.381,4.038) 34.011,3.349 59.7,3.223 66.3,3.225 66.922,3.847 66.922,9.02 67.04,9.137 62.707,9.137 56.834,9.137 42.026,9.137 cw(c42.026,13.908) 38.652,10.534 37.007,12.179 37.007,54.614 39.875,54.616
+5V on Bottom Layer "NONET_L02_P-001" (solid, pour order 52): 53.002,10.65 41.445,10.65 cw(c41.882,11.398) 41.044,11.619 42.945,13.52 42.945,27.778 cw(c44.567,27.778) 44.6,29.4 51.4,29.4 cw(c51.4,26.6) 54.2,26.6 54.2,12.271 cw(c52.505,12.271)
+12V on Bottom Layer "NONET_L02_P-001" (solid, pour order 75): 73.097,2.941 73.096,2.942 31.1,2.942 31.1,0.7 73.105,0.7 73.105,0.708 73.347,0.95 73.347,2.686 73.113,2.925
+12V on Bottom Layer "NONET_L02_P-001" (solid, remove dead copper, pour order 64): 21.05,99.352 21.05,1.175 21.525,0.7 33.35,0.7 32.924,99.352
GND on Top Layer "NONET_L02_P-001" (solid, remove dead copper, pour order 70): 0,100 100,100 100,0 0,0

## Keep-outs
Keep-Out Layer:
  the board outline again, w0.01

## Silkscreen, mask and mechanical layers (free items; w line width, h text height)
Top Overlay:
  text "V" at 57.129,72.254 h1
  text "3.3V" at 59.579,72.254 h1
  text "5V" at 64.254,72.254 h1
  text "12V" at 68.204,72.254 h1
  text "PWR LEDS" at 56.046,66.904 h1 r90
  text "A" at 45.454,54.104 h1
  text "B" at 48.004,54.054 h1
  text "GND" at 41.454,54.029 h1
  text "TX" at 43.034,38.704 h0.7 r90
  text "UART" at 44.154,35.875 h1
  text "RTS" at 43.034,35.667 h0.7 r90
  text "CTS" at 43.034,32.743 h0.7 r90
  text "RX" at 43.034,30.668 h0.7 r90
Top Paste:
  rectangle: 101.45,28.75 102.713,38.515

## Text inside footprints (layer, text, board x,y; h text height)
J2: Mechanical 13 "1" at 7.45,44.225 h1.27 r90
J4: Mechanical 13 "1" at 7.45,72.225 h1.27 r90
J12: Mechanical 13 "1" at 7.45,37.225 h1.27 r90
J14: Mechanical 13 "1" at 7.45,65.225 h1.27 r90
J22: Mechanical 13 "1" at 7.45,30.225 h1.27 r90
J24: Mechanical 13 "1" at 7.45,58.225 h1.27 r90
J32: Mechanical 13 "1" at 7.45,23.225 h1.27 r90
J34: Mechanical 13 "1" at 7.45,51.225 h1.27 r90
J41: Mechanical 13 "1" at 92.5,40.1 h1.27 r270
J42: Mechanical 13 "1" at 92.5,75.1 h1.27 r270
J43: Mechanical 13 "1" at 92.5,68.1 h1.27 r270
J44: Mechanical 13 "1" at 92.5,33.1 h1.27 r270
J45: Mechanical 13 "1" at 92.5,61.1 h1.27 r270
J46: Mechanical 13 "1" at 92.5,26.1 h1.27 r270
J47: Mechanical 13 "1" at 92.5,54.1 h1.27 r270
J48: Mechanical 13 "1" at 92.5,47.1 h1.27 r270